# Altium PCB PCI short card universal - 32 BIT.PCBDOC
Units mil, origin at the board's own origin, x right, y up, seen from the top; angles counter-clockwise.
Board outline 6875 x 4200 mil, 10 copper layers (TopLayer, MidLayer1, MidLayer2, MidLayer3, MidLayer4, MidLayer5, MidLayer6, MidLayer7, MidLayer8, BottomLayer); 1 components, 0 nets, 120 pads, 0 vias.
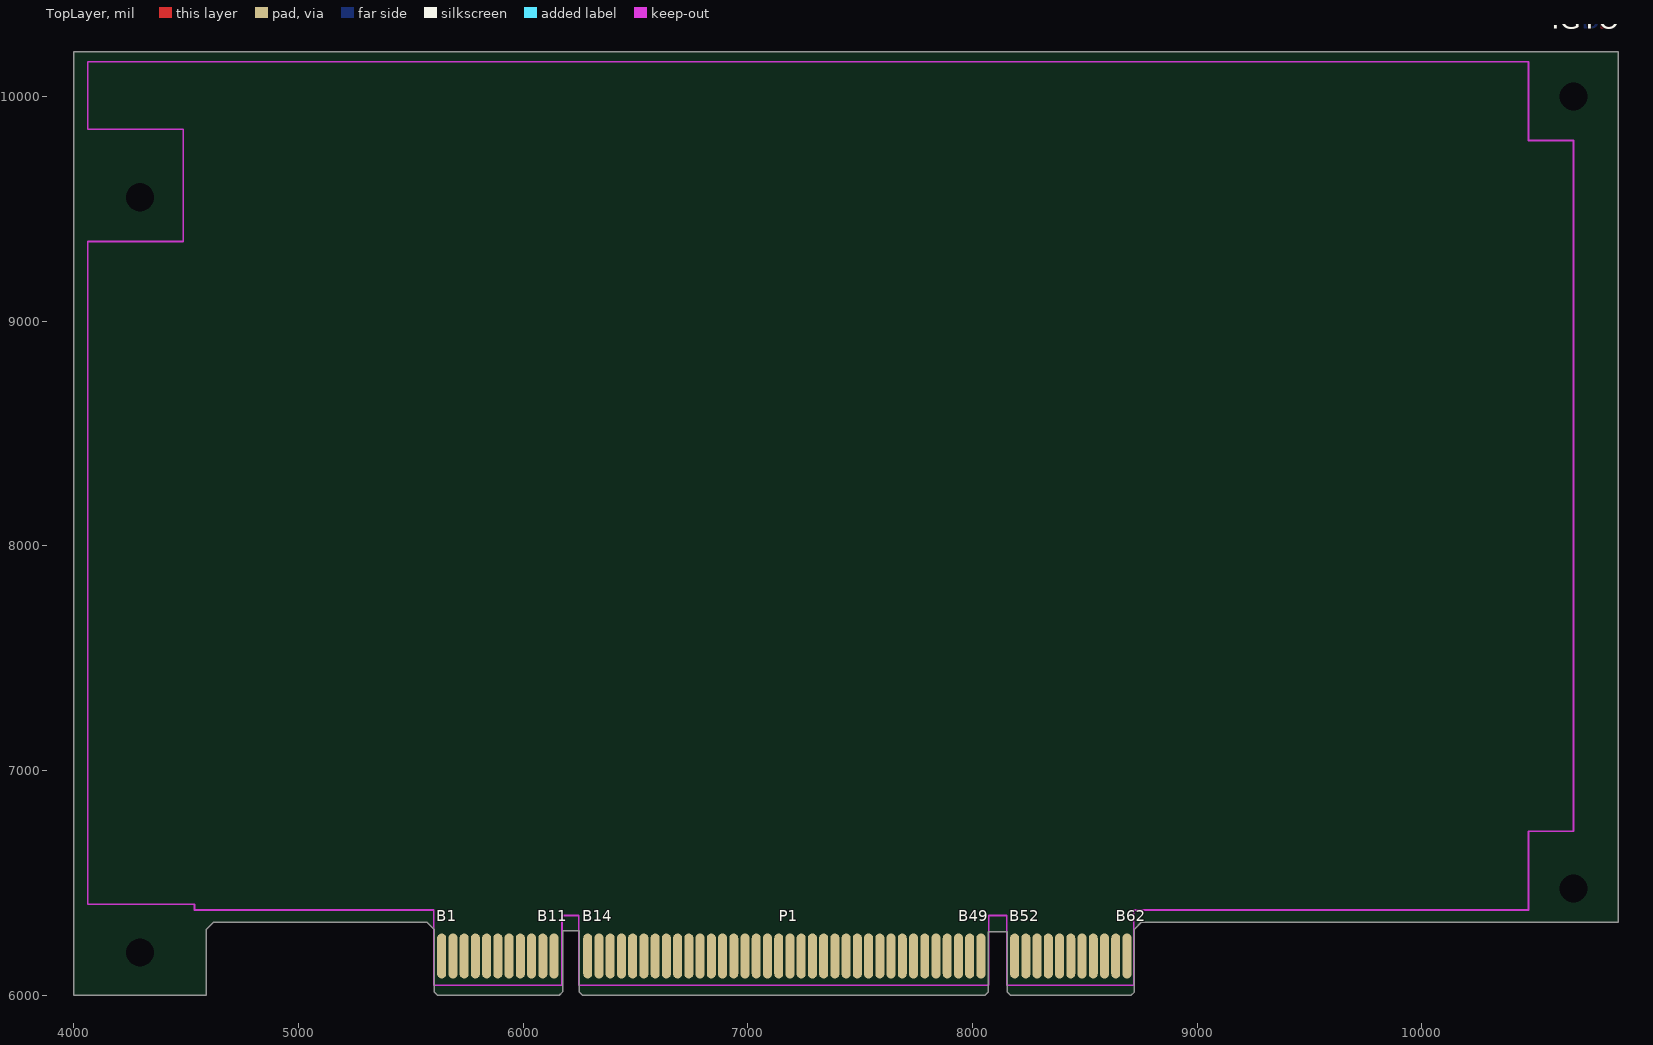
[diagram p0: TopLayer view]
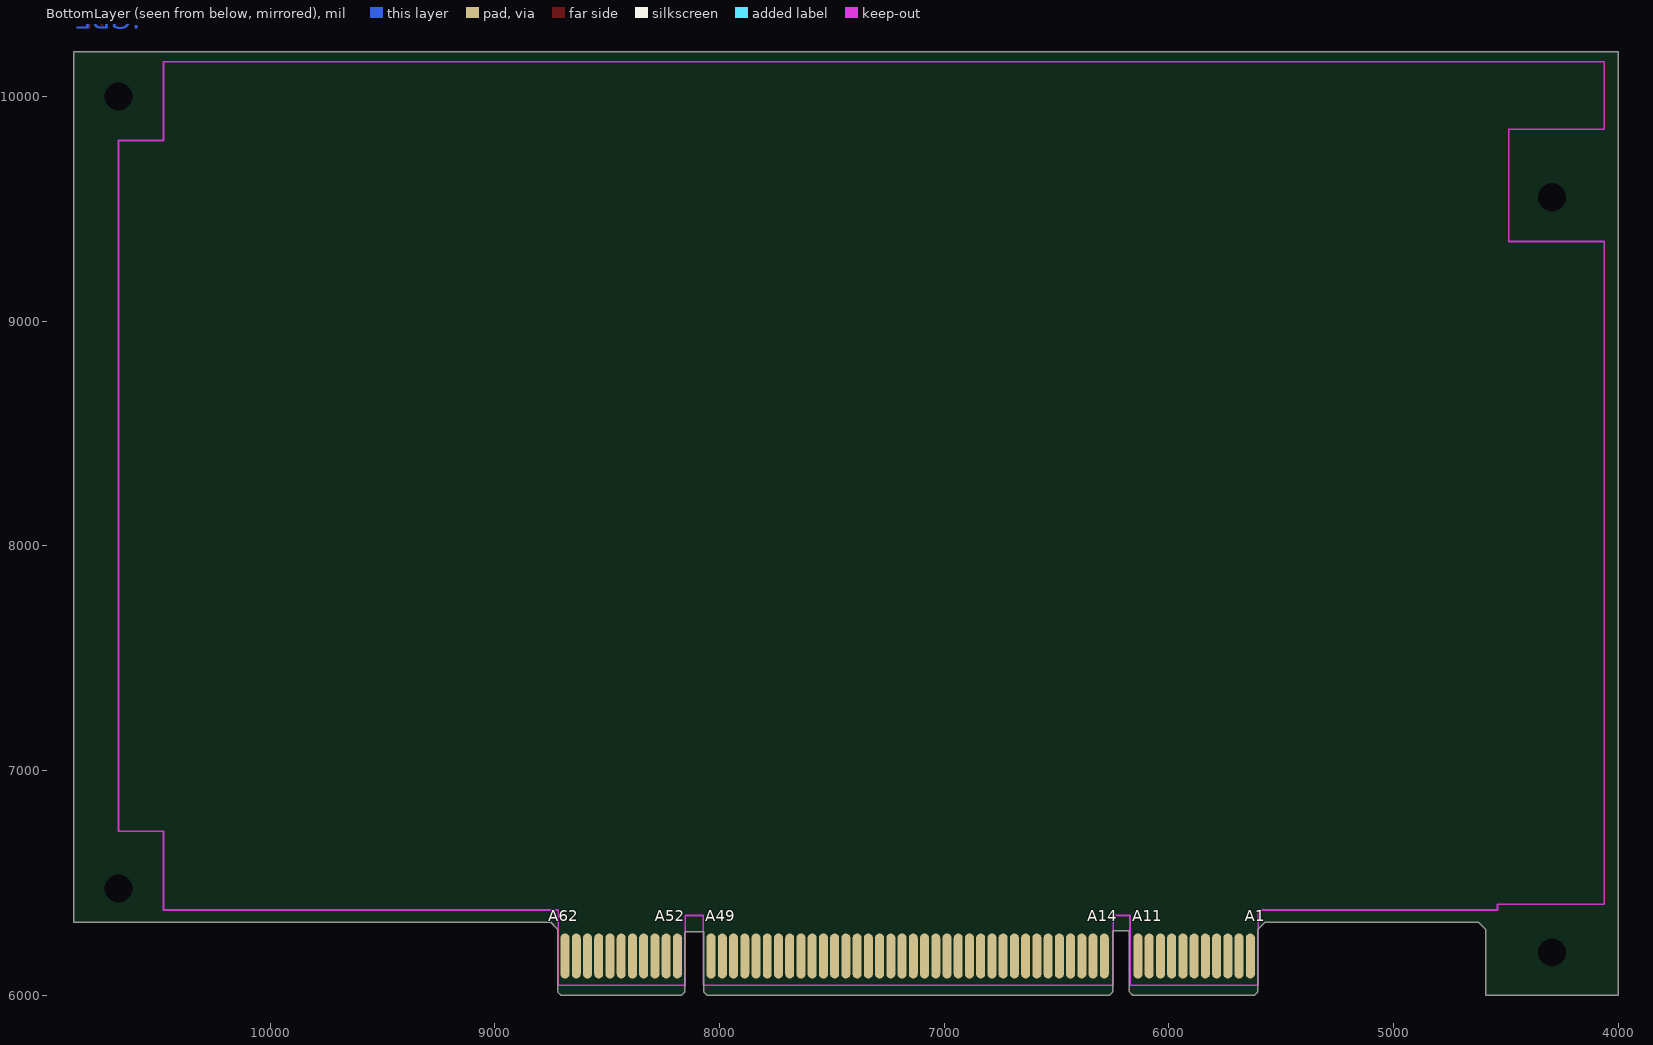
[diagram p1: BottomLayer view, seen from below]
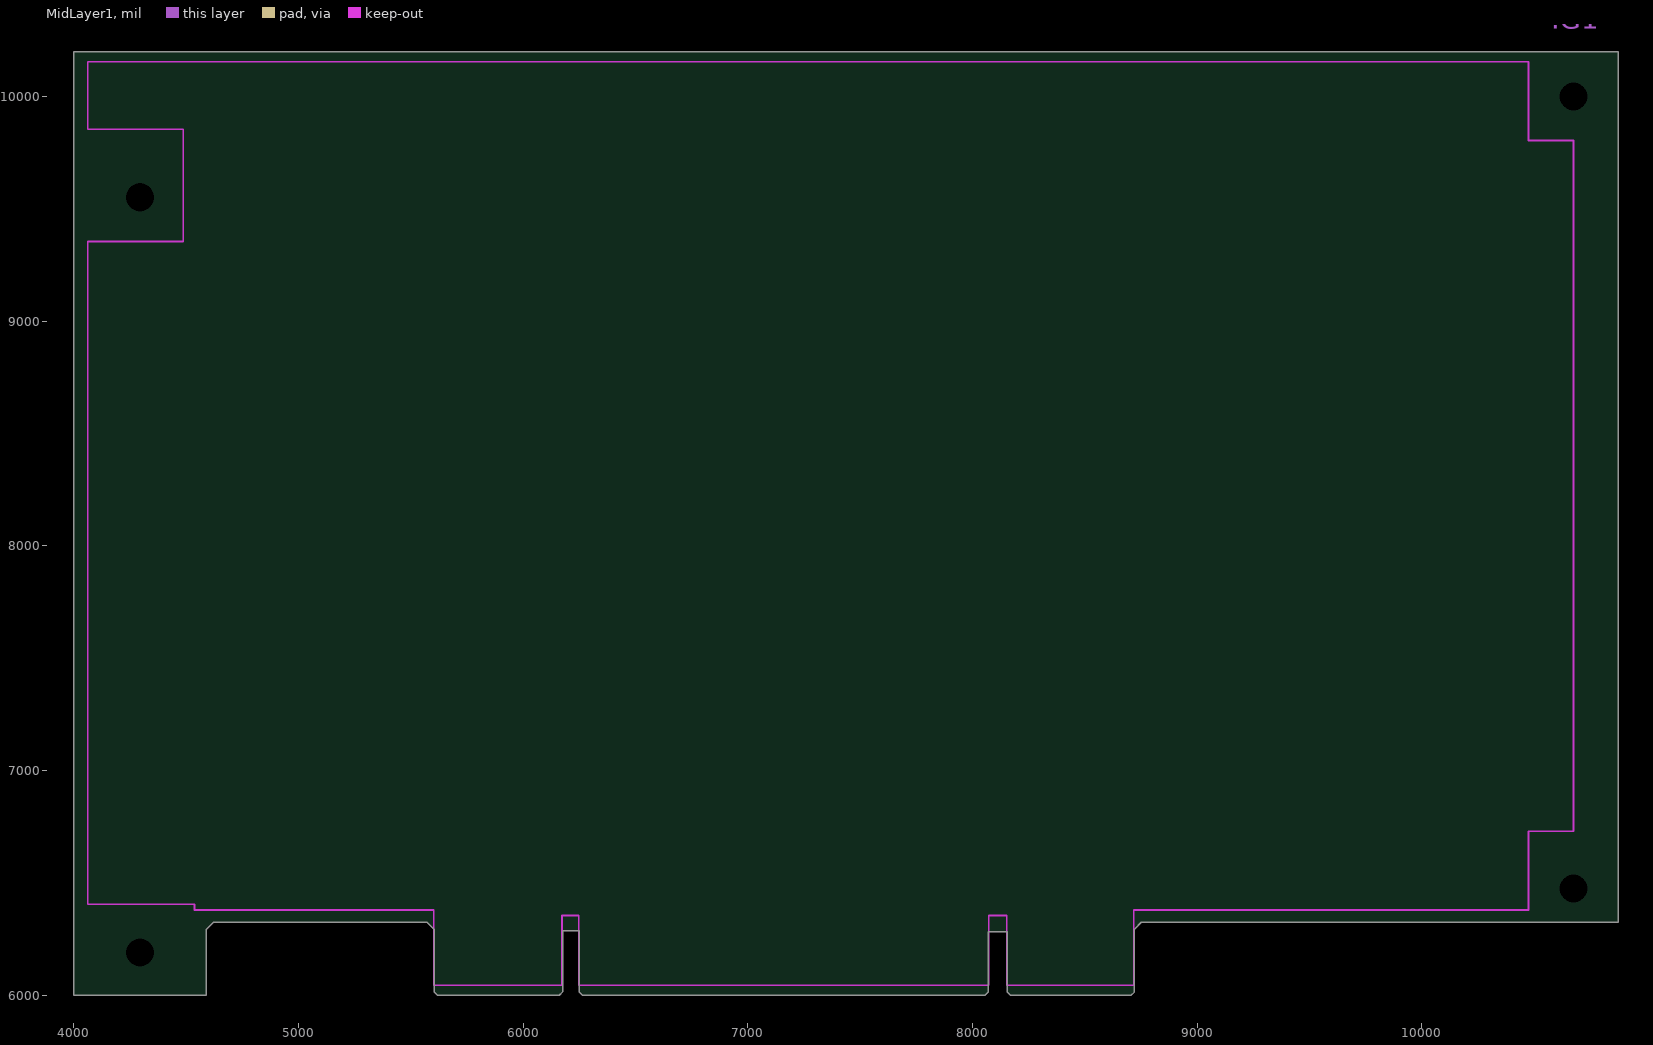
[diagram p2: MidLayer1]
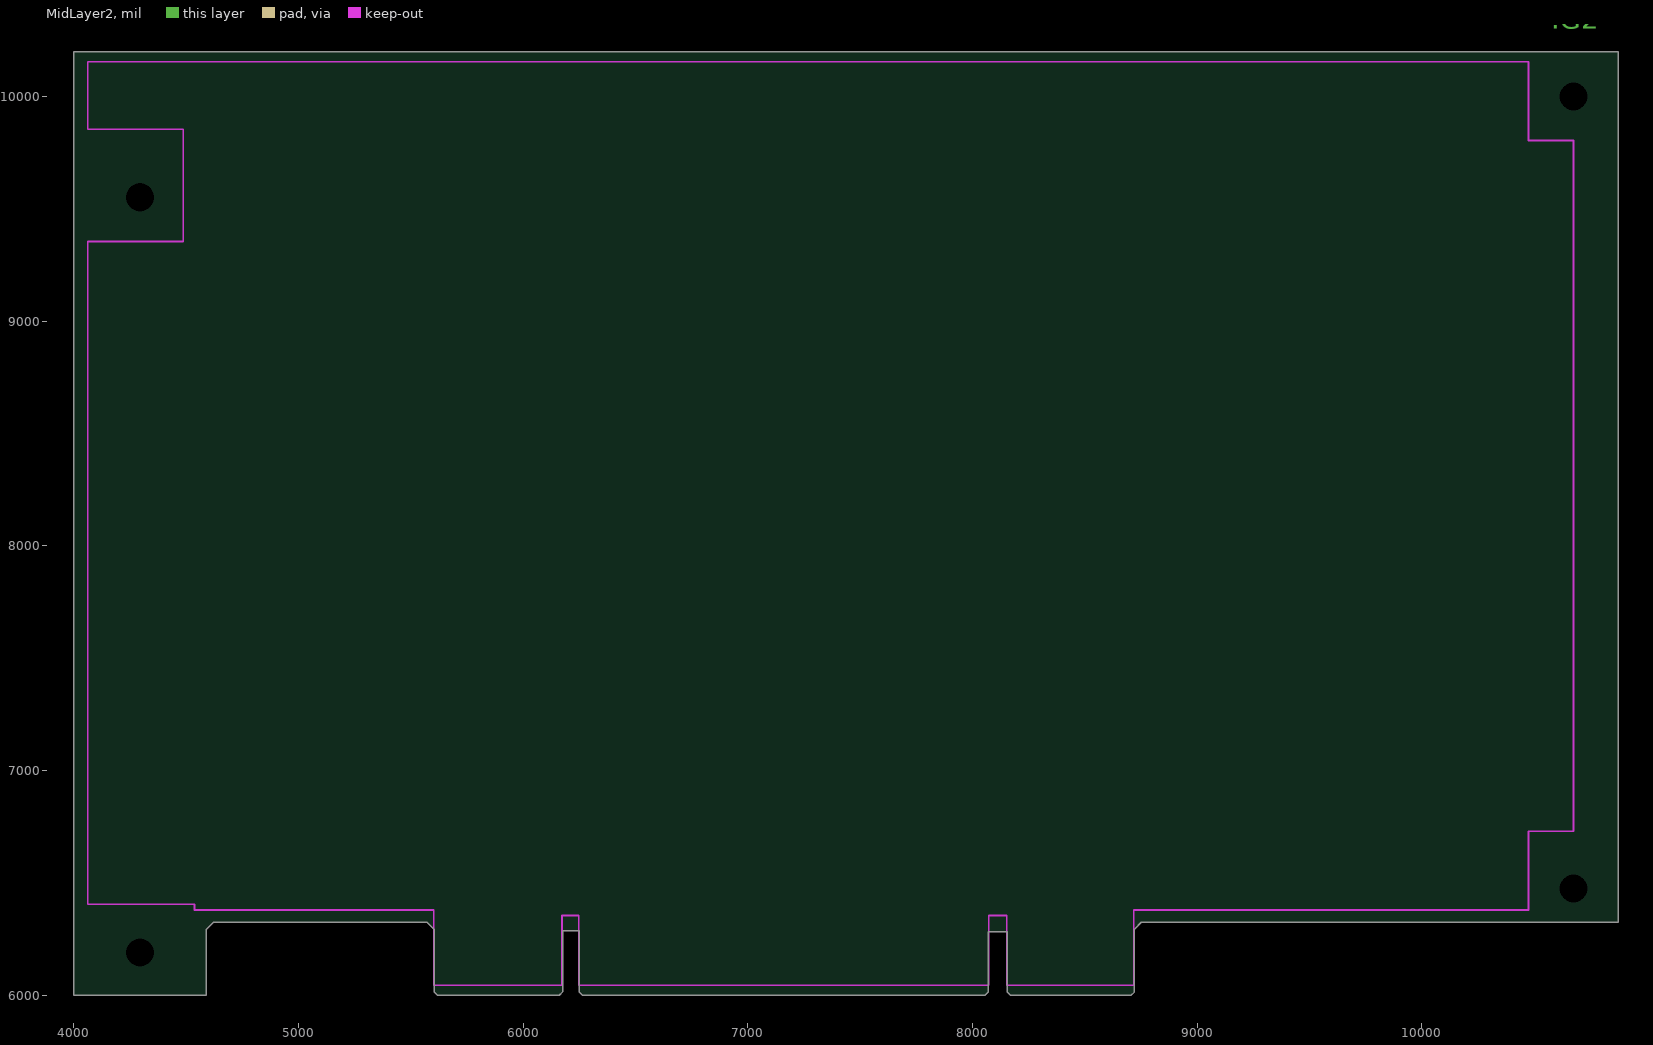
[diagram p3: MidLayer2]
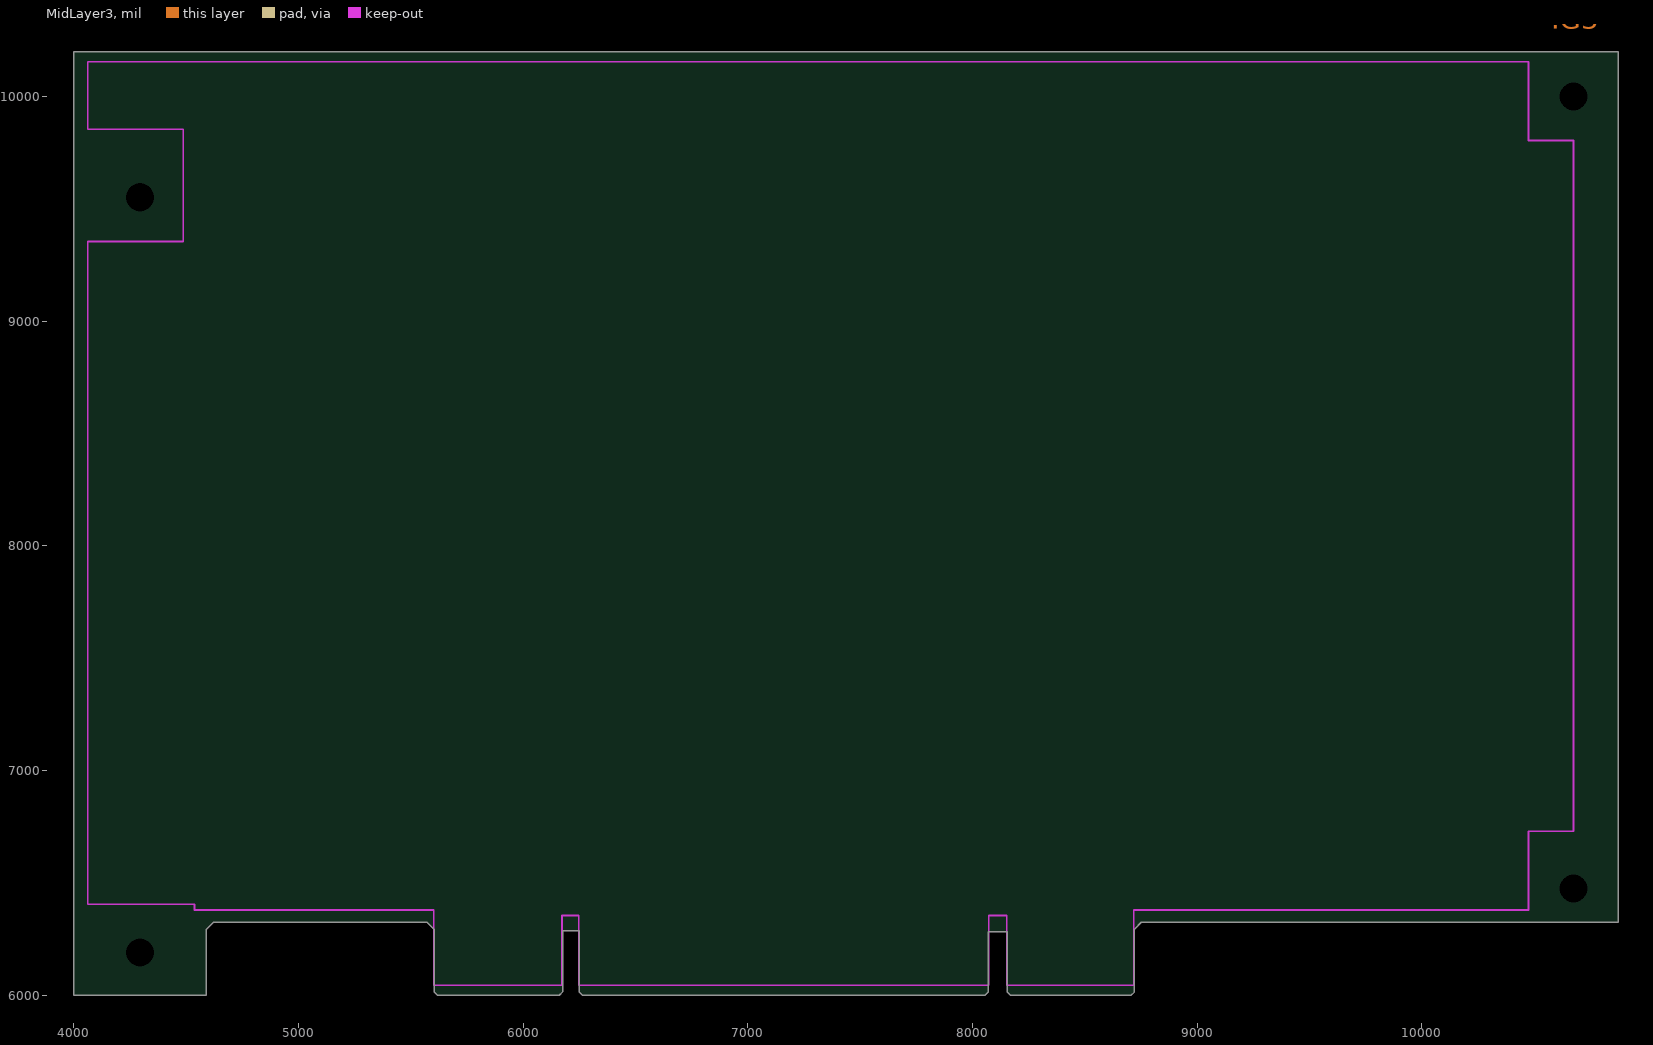
[diagram p4: MidLayer3]
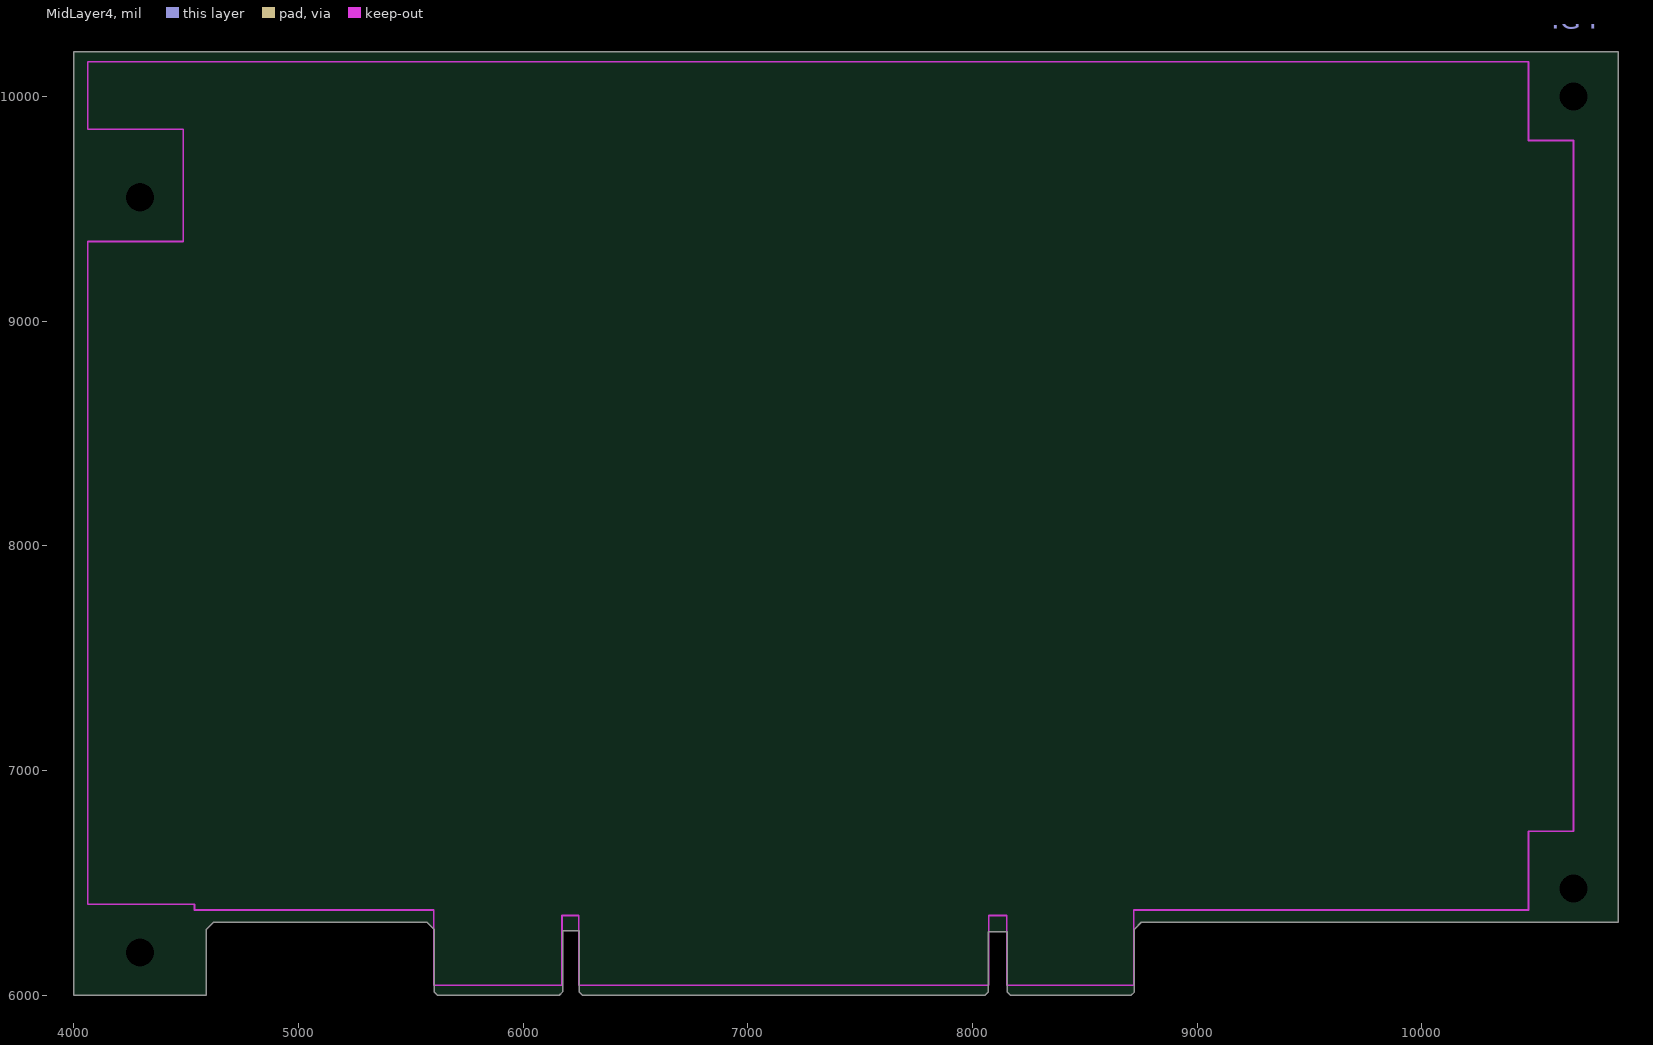
[diagram p5: MidLayer4]
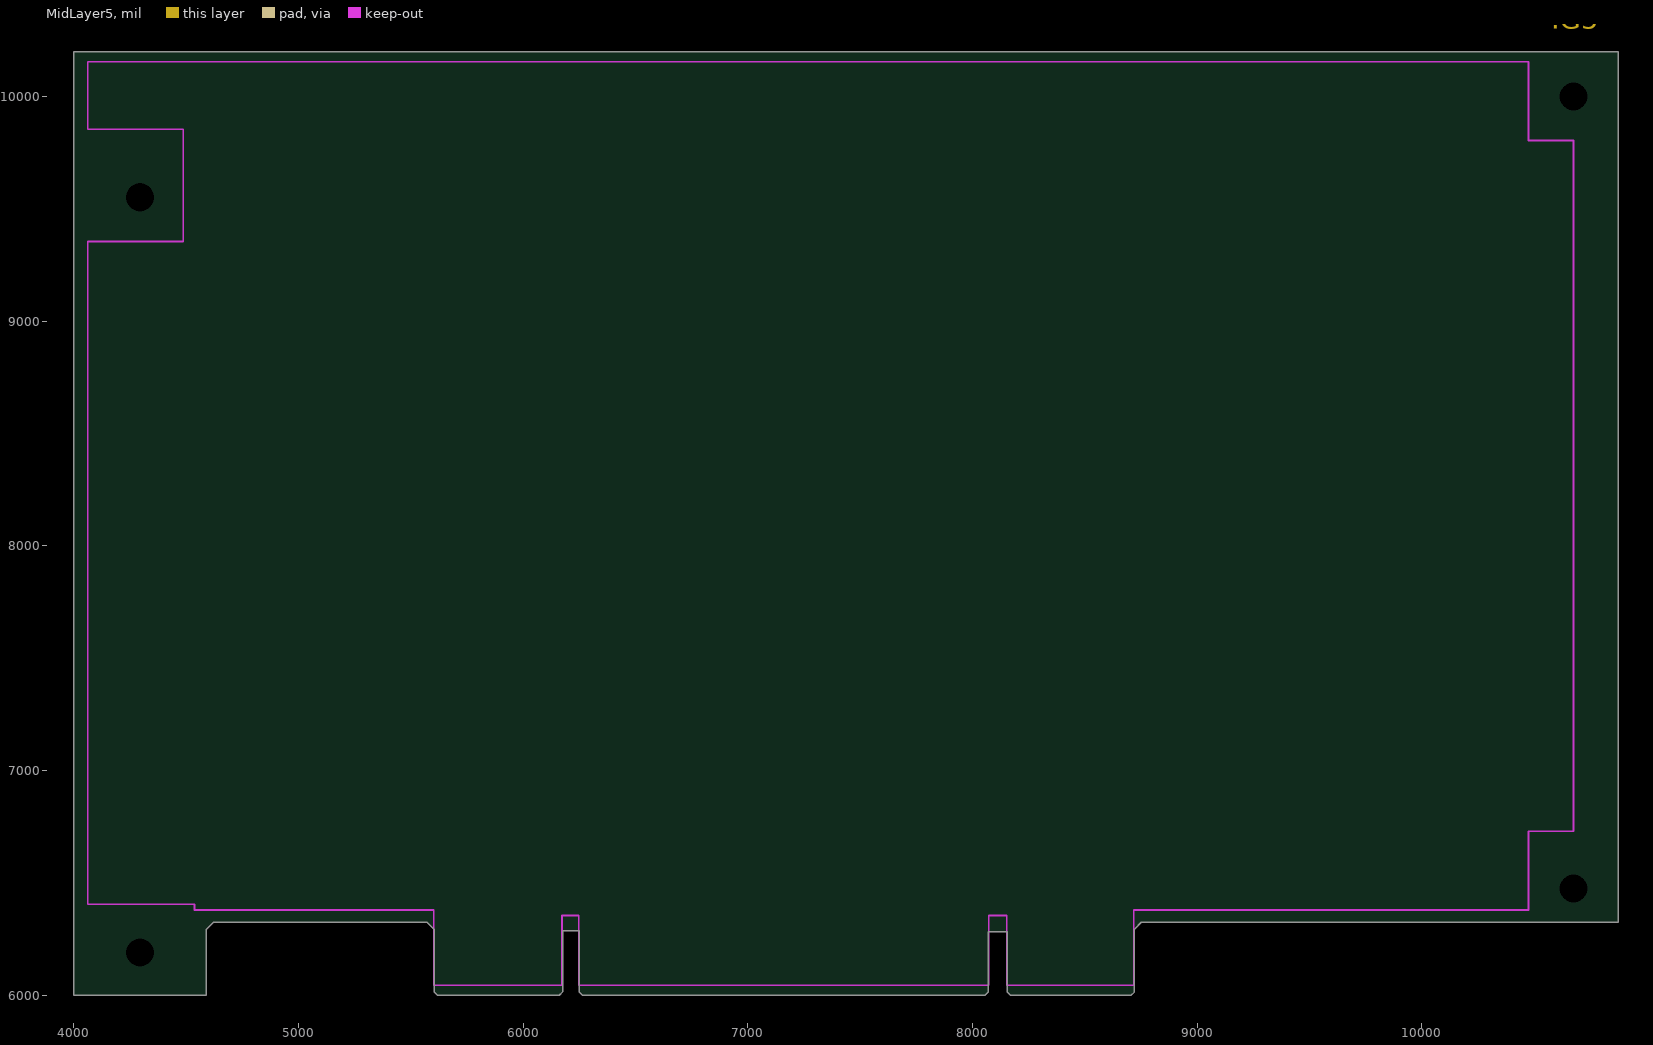
[diagram p6: MidLayer5]
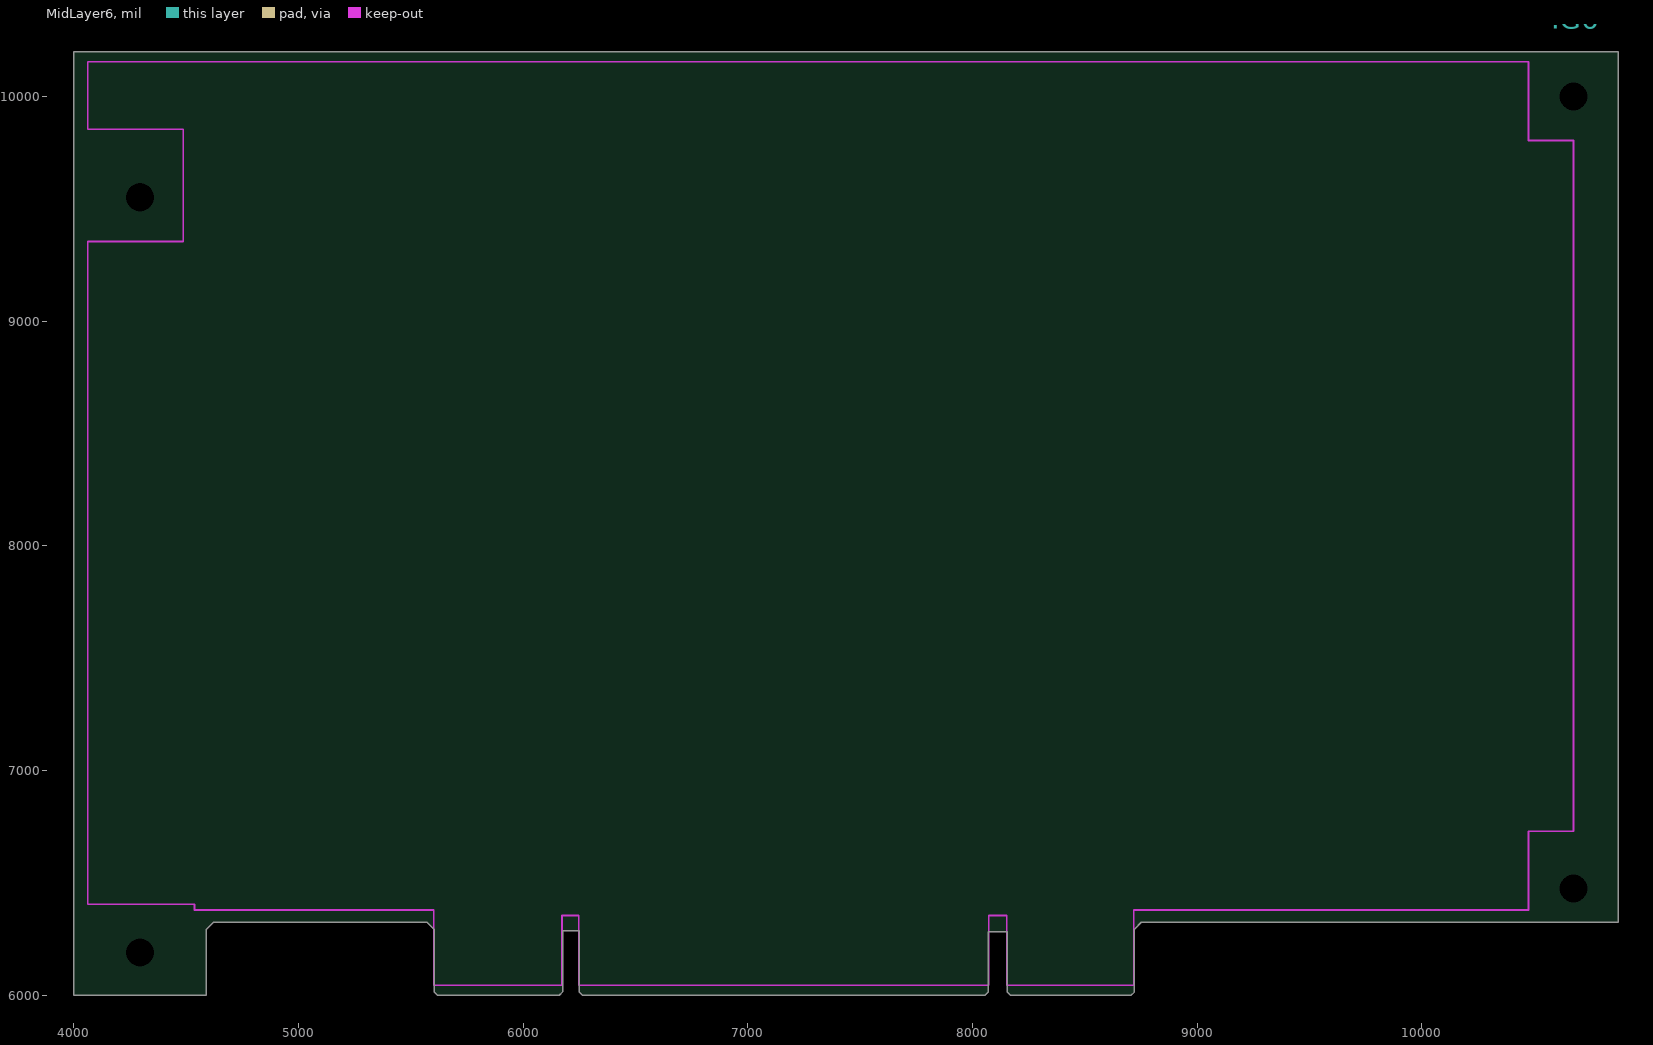
[diagram p7: MidLayer6]
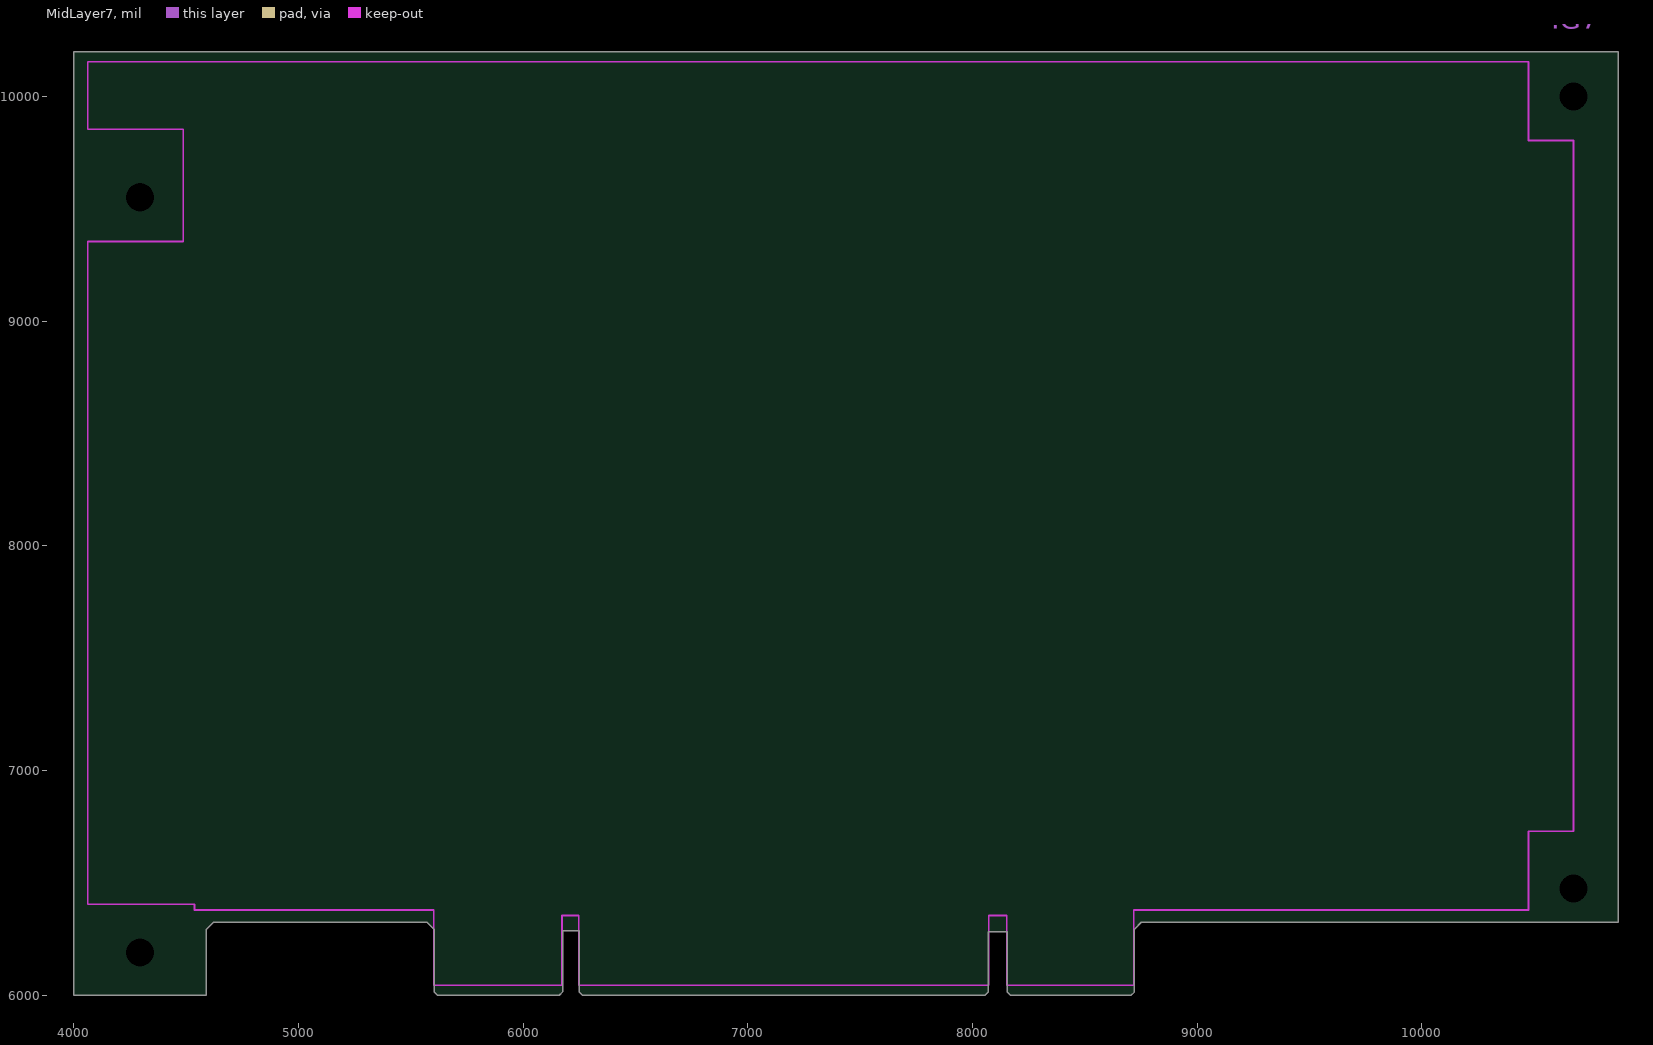
[diagram p8: MidLayer7]
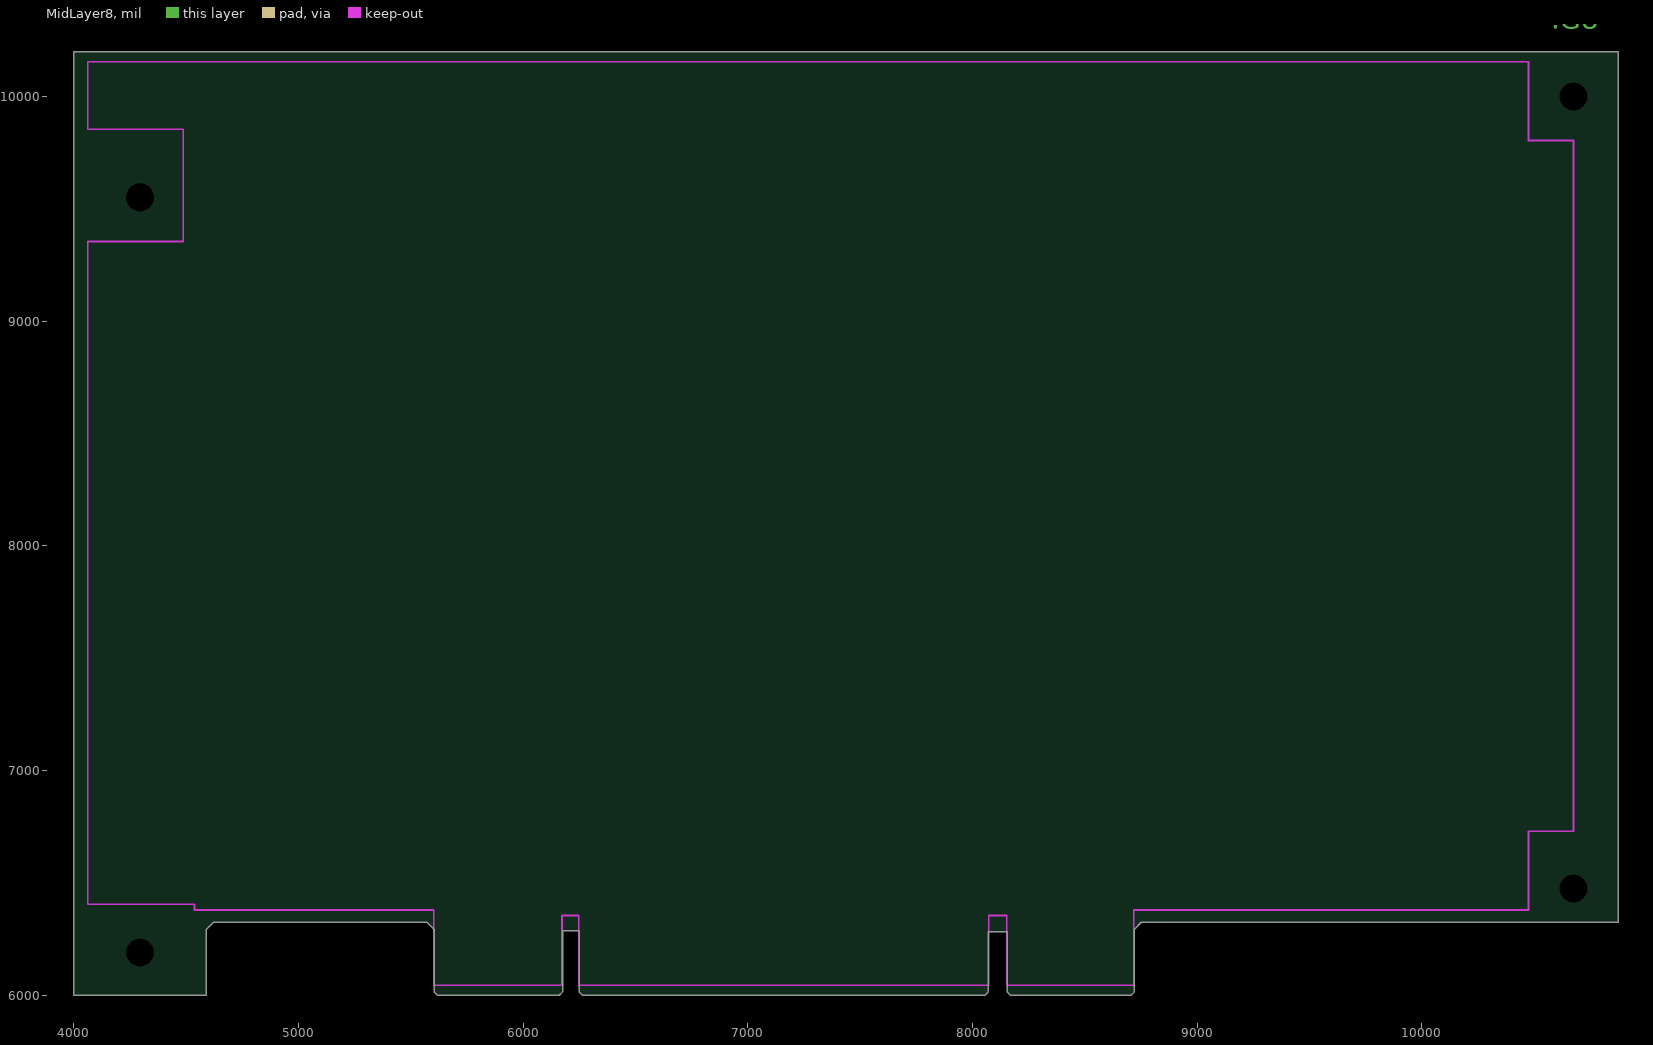
[diagram p9: MidLayer8]

## Layer stack, top to bottom
TopSolder: solder mask 0.4, Solder Resist, Dk 3.5
TopLayer: signal copper 1.4
Dielectric1: core 12.6, FR-4, Dk 4.8
MidLayer1: signal copper 1.4
Dielectric2: prepreg 12.6, FR-4, Dk 4.8
MidLayer2: signal copper 1.4
Dielectric3: core 12.6, FR-4, Dk 4.8
MidLayer3: signal copper 1.4
Dielectric4: prepreg 12.6, FR-4, Dk 4.8
MidLayer4: signal copper 1.4
Dielectric5: core 12.6, FR-4, Dk 4.8
MidLayer5: signal copper 1.4
Dielectric6: prepreg 12.6, FR-4, Dk 4.8
MidLayer6: signal copper 1.4
Dielectric7: core 12.6, FR-4, Dk 4.8
MidLayer7: signal copper 1.4
Dielectric8: prepreg 12.6, FR-4, Dk 4.8
MidLayer8: signal copper 1.4
Dielectric9: core 12.6, FR-4, Dk 4.8
BottomLayer: signal copper 1.4
BottomSolder: solder mask 0.4, Solder Resist, Dk 3.5

## Board outline
4000,6000 4591,6000 4591,6294 4622,6325 5573,6325 5605,6293 5605,6015 5620,6000 6161,6000 6176,6015 6176,6288 6250,6288 6250,6015 6265,6000 8056,6000 8071,6015 8071,6283 8155,6283 8155,6015 8170,6000 8706,6000 8721,6015 8721,6294 8752,6325 10875,6325 10875,10200 4000,10200

## Design rules (kind name [scope] priority, off if disabled: settings)
Clearance [All] p1: gap=10
FabricationTestPointUsage TestPointUsage [All] p1: valid=0 allowmultiple=FALSE
FabricationTestpoint Testpoint [All] p1: side=3 testpointundercomponent=TRUE minsize=40 maxsize=100 preferedsize=60 minholesize=20 maxholesize=40 preferedholesize=32 testpointgrid=1 allowsidetop=TRUE allowsidebottom=TRUE usegrid=TRUE gridtolerance=0.01
PasteMaskExpansion PasteMaskExpansion_1 [InComponent('P1')] p1: expansion=-100
PasteMaskExpansion [All] p2: expansion=0
PlaneClearance [All] p1: clearance=10
PolygonConnect [All] p1: connectstyle=Relief reliefconductorwidth=10 reliefentries=4 polygonreliefangle="90 Angle" airgapwidth=10
RoutingVias [All] p1: holewidth=28 width=50 viastyle="Through Hole" minholewidth=28 minwidth=50 maxholewidth=28 maxwidth=50
SilkToSolderMaskClearance SilkscreenOverComponentPads [IsPad] p1: minsilkscreentomaskgap=10 clearancetoexposedcopper=TRUE
SolderMaskExpansion [All] p1: expansion=2
Width [All] p1: maxlimit=10 minlimit=10 preferedwidth=10
25 further rules are at their usual default settings.

## Components (designator, comment, footprint, x,y, rotation, side; value= is the part's Value field where it differs from the comment)
P1 "PCIUV32BIT" PCIUV32BIT 5638,6175 r0 top locked

## Footprints (in the part's own frame and the unit in brackets; to place one, negate y for a bottom-side part, rotate by r counter-clockwise, add the part's x,y. Pads: shape width x height; smd on the part's side, far side on the other; paste and mask are expansions set on the pad)
PCIUV32BIT [mil]
  oval 40x200 smd far side: A1(0,0) A2(50,0) A3(100,0) A4(150,0) A5(200,0) A6(250,0) A7(300,0) A8(350,0) A9(400,0) A10(450,0) A11(500,0) A14(650,0) A15(700,0) A16(750,0) A17(800,0) A18(850,0) A19(900,0) A20(950,0) A21(1000,0) A22(1050,0) A23(1100,0) A24(1150,0) A25(1200,0) A26(1250,0) A27(1300,0) A28(1350,0) A29(1400,0) A30(1450,0) A31(1500,0) A32(1550,0) A33(1600,0) A34(1650,0) A35(1700,0) A36(1750,0) A37(1800,0) A38(1850,0) A39(1900,0) A40(1950,0) A41(2000,0) A42(2050,0) A43(2100,0) A44(2150,0) A45(2200,0) A46(2250,0) A47(2300,0) A48(2350,0) A49(2400,0) A52(2550,0) A53(2600,0) A54(2650,0) A55(2700,0) A56(2750,0) A57(2800,0) A58(2850,0) A59(2900,0) A60(2950,0) A61(3000,0) A62(3050,0)
  oval 40x200 smd: B1(0,0) B2(50,0) B3(100,0) B4(150,0) B5(200,0) B6(250,0) B7(300,0) B8(350,0) B9(400,0) B10(450,0) B11(500,0) B14(650,0) B15(700,0) B16(750,0) B17(800,0) B18(850,0) B19(900,0) B20(950,0) B21(1000,0) B22(1050,0) B23(1100,0) B24(1150,0) B25(1200,0) B26(1250,0) B27(1300,0) B28(1350,0) B29(1400,0) B30(1450,0) B31(1500,0) B32(1550,0) B33(1600,0) B34(1650,0) B35(1700,0) B36(1750,0) B37(1800,0) B38(1850,0) B39(1900,0) B40(1950,0) B41(2000,0) B42(2050,0) B43(2100,0) B44(2150,0) B45(2200,0) B46(2250,0) B47(2300,0) B48(2350,0) B49(2400,0) B52(2550,0) B53(2600,0) B54(2650,0) B55(2700,0) B56(2750,0) B57(2800,0) B58(2850,0) B59(2900,0) B60(2950,0) B61(3000,0) B62(3050,0)

## Free pads (board coordinates)
  round 50 hole 125: 1(10675,6475) 2(10675,10000) 3(4295,9552) 4(4295,6190)

## Nets (pads, with @x,y where several pads share a name; then routed paths per layer and width w, separated by ;. In a path a pad name is that pad's centre, name@x,y a point inside that pad or via, vN(x,y) a via of type N, cw(c..) or ccw(c..) an arc to the next point about the centre after c; other vN are vias at no path point)
pads on no net: P1.A1 P1.A2 P1.A3 P1.A4 P1.A5 P1.A6 P1.A7 P1.A8 P1.A9 P1.A10 P1.A11 P1.A14 P1.A15 P1.A16 P1.A17 P1.A18 P1.A19 P1.A20 P1.A21 P1.A22 P1.A23 P1.A24 P1.A25 P1.A26 P1.A27 P1.A28 P1.A29 P1.A30 P1.A31 P1.A32 P1.A33 P1.A34 P1.A35 P1.A36 P1.A37 P1.A38 P1.A39 P1.A40 P1.A41 P1.A42 P1.A43 P1.A44 P1.A45 P1.A46 P1.A47 P1.A48 P1.A49 P1.A52 P1.A53 P1.A54 P1.A55 P1.A56 P1.A57 P1.A58 P1.A59 P1.A60 P1.A61 P1.A62 P1.B1 P1.B2 P1.B3 P1.B4 P1.B5 P1.B6 P1.B7 P1.B8 P1.B9 P1.B10 P1.B11 P1.B14 P1.B15 P1.B16 P1.B17 P1.B18 P1.B19 P1.B20 P1.B21 P1.B22 P1.B23 P1.B24 P1.B25 P1.B26 P1.B27 P1.B28 P1.B29 P1.B30 P1.B31 P1.B32 P1.B33 P1.B34 P1.B35 P1.B36 P1.B37 P1.B38 P1.B39 P1.B40 P1.B41 P1.B42 P1.B43 P1.B44 P1.B45 P1.B46 P1.B47 P1.B48 P1.B49 P1.B52 P1.B53 P1.B54 P1.B55 P1.B56 P1.B57 P1.B58 P1.B59 P1.B60 P1.B61 P1.B62

## Keep-outs
KeepOutLayer:
  lines w8: 4063,6405 4063,9355 4488,9355 4488,9855 4063,9855 4063,10155 10475,10155 10475,9805 10675,9805 10675,6730 10475,6730 10475,6380 8718,6380 8718,6045 8153,6045 8153,6355 8073,6355 8073,6045 6248,6045 6248,6355 6173,6355 6173,6045 5603,6045 5603,6380 4538,6380 4538,6405 4063,6405

## Other copper
TopLayer:
  text ".GTL" at 10577,10303 h90
MidLayer1:
  text ".G1" at 10577,10303 h90
MidLayer2:
  text ".G2" at 10577,10303 h90
MidLayer3:
  text ".G3" at 10577,10303 h90
MidLayer4:
  text ".G4" at 10577,10303 h90
MidLayer5:
  text ".G5" at 10577,10303 h90
MidLayer6:
  text ".G6" at 10577,10303 h90
MidLayer7:
  text ".G7" at 10577,10303 h90
MidLayer8:
  text ".G8" at 10577,10303 h90
BottomLayer:
  text "P/N XXXXXX-XXX REV A" at 5320,10400 h75
  text ".GBL" at 10577,10303 h90

## Silkscreen, mask and mechanical layers (free items; w line width, h text height)
TopOverlay:
  rectangle: 4281,10603 5031,10803
  rectangle: 4281,10893 5031,11093
  lines w10: 5392.59,10995.97 ccw(c5441,11035.5) 5392.71,10995.83
  text "C" at 5496,10998 h60
  text "2002 COMPANY NAME" at 5646,10998 h75
  text "S/N" at 4031,10950.5 h75
  text "BOARD NAME" at 5496,10823 h75
  text "ASSY NO.: XXXXXX" at 5496,10673 h75
  text "REV" at 4031,10653 h75
  text ".GTO" at 10577,10303 h90
TopPaste:
  text ".GTP" at 10577,10303 h90
BottomPaste:
  text ".GBP" at 10577,10303 h90
TopSolder:
  rectangle: 5583,5980 8738,6280
  text ".GTS" at 10577,10303 h90
BottomSolder:
  rectangle: 5583,5980 8738,6280
  text ".GBS" at 10577,10303 h90
Mechanical1:
  lines w20: 5573,6325 5605,6293 5605,6015 5620,6000 6161,6000 6176,6015 6176,6288 6250,6288 6250,6015 6265,6000 8056,6000 8071,6015 8071,6283 8155,6283 8155,6015 8170,6000 8706,6000 8721,6015 8721,6294 8752,6325 10875,6325 10875,10200 4000,10200 4000,6000 4591,6000 4591,6294 4622,6325 5574,6325
Mechanical4:
  circle w10: c5578.67,6044.32 r100
  lines w8: 11740,7320 11915,7320 11915,7025 ; 11840,6820 12240,6820 ; 11840,7020 12190,7020 ; 11915,6520 11915,6815 ; 12002.5,6495 12297.5,6495 ; 12077.5,8045 12385,8045 ; 12302.5,6420 12302.5,6770 ; 12327.5,6420 12327.5,6770 ; 12390,7820 12390,8120 ; 12415,7070 12690,8070 ; 12627.5,6495 12332.5,6495 ; 12959.72,7890.07 12670.77,7995.24 ; 11915,6815 11940,6665 11890,6665 11915,6815 ; 11915,7025 11940,7175 11890,7175 11915,7025 ; 12297.5,6495 12147.5,6520 12147.5,6470 12297.5,6495 ; 12332.5,6495 12482.5,6520 12482.5,6470 12332.5,6495 ; 12385,8045 12235,8070 12235,8020 12385,8045 ; 12670.77,7995.24 12820.27,7967.43 12803.17,7920.45 12670.77,7995.24 ; 11895,6670 11935,6670 11915,6805 11895,6670 ; 11895,7170 11935,7170 11915,7035 11895,7170 ; 11900,6675 11930,6675 11915,6795 11900,6675 ; 11900,7165 11930,7165 11915,7045 11900,7165 ; 11905,6680 11915,6785 11925,6680 11905,6680 ; 11905,7160 11925,7160 11915,7055 11905,7160 ; 11910,6685 11915,6775 11920,6685 11910,6685 ; 11910,7155 11920,7155 11915,7065 11910,7155 ; 12152.5,6475 12287.5,6495 12152.5,6515 12152.5,6475 ; 12157.5,6480 12277.5,6495 12157.5,6510 12157.5,6480 ; 12162.5,6485 12267.5,6495 12162.5,6505 12162.5,6485 ; 12167.5,6490 12167.5,6500 12257.5,6495 12167.5,6490 ; 12240,7020 12302.5,6820 12327.5,6820 12390,7020 12390,7782.5 12352.5,7782.5 12352.5,7870 12290,7720 12277.5,7782.5 12240,7782.5 12240,7020 ; 12240,8025 12375,8045 12240,8065 12240,8025 ; 12245,8030 12365,8045 12245,8060 12245,8030 ; 12250,8035 12250,8055 12355,8045 12250,8035 ; 12255,8040 12255,8050 12345,8045 12255,8040 ; 12342.5,6495 12477.5,6515 12477.5,6475 12342.5,6495 ; 12352.5,6495 12472.5,6510 12472.5,6480 12352.5,6495 ; 12362.5,6495 12467.5,6505 12467.5,6485 12362.5,6495 ; 12372.5,6495 12462.5,6500 12462.5,6490 12372.5,6495 ; 12680.16,7991.82 12813.86,7964.45 12800.18,7926.86 12680.16,7991.82 ; 12689.56,7988.4 12807.45,7961.46 12797.19,7933.27 12689.56,7988.4 ; 12698.96,7984.98 12801.05,7958.47 12794.21,7939.67 12698.96,7984.98 ; 12708.36,7981.56 12794.64,7955.48 12791.22,7946.08 12708.36,7981.56
  lines w10: 5436.67,5991.32 5456.67,5996.32 5436.67,6046.32 5436.67,5991.32 ; 5436.87,6046.16 5458.36,6096.79 5438,6100 5436.87,6046.16
  text ".Pcb_File_Name_No_Path" at 8677,10493 h90
  text ".Printout_Name" at 8677,10303 h90
  text "DETAIL A" at 11940,8320 h150
  text "o" at 12615,8082.5 h48
  text "20" at 12452.5,7982.5 h90
  text "0.071" at 11377.5,7270 h90
  text "+.010" at 11390,7120 h75
  text "-.015" at 11390,6970 h75
  text "0.010" at 12690,6445 h90
  text "+.005" at 12690,6295 h75
  text "-.010" at 12690,6145 h75
  text "SEE DETAIL A" at 4690,6000 h75
DrillDrawing:
  text ".LEGEND" at 11205,9175 h90
  text "Drilling Details." at 11205,9025 h90

## Dimensions
3980,6190 to 4000,6000 on Mechanical4
4295,5980 to 4000,6000 on Mechanical4

## Text inside footprints (layer, text, board x,y; h text height)
P1: TopOverlay "B1" at 5613,6330 h48; TopOverlay "B11" at 6063,6330 h48; TopOverlay "B49" at 7938,6330 h48; TopOverlay "B62" at 8638,6330 h48; TopOverlay "B52" at 8163,6330 h48; TopOverlay "B14" at 6263,6330 h48; BottomOverlay "A62" at 8763,6330 h48; BottomOverlay "A52" at 8288,6330 h48; BottomOverlay "A14" at 6363,6330 h48; BottomOverlay "A1" at 5663,6330 h48; BottomOverlay "A11" at 6163,6330 h48; BottomOverlay "A49" at 8063,6330 h48